# Altium PCB PCB1.PcbDoc
Units mil, origin at the board's own origin, x right, y up, seen from the top; angles counter-clockwise.
Board outline 5725 x 3325 mil, 2 copper layers (Top Layer, Bottom Layer); 43 components, 38 nets, 152 pads, 0 vias.
Unrouted connection lines stored in the file: 70.
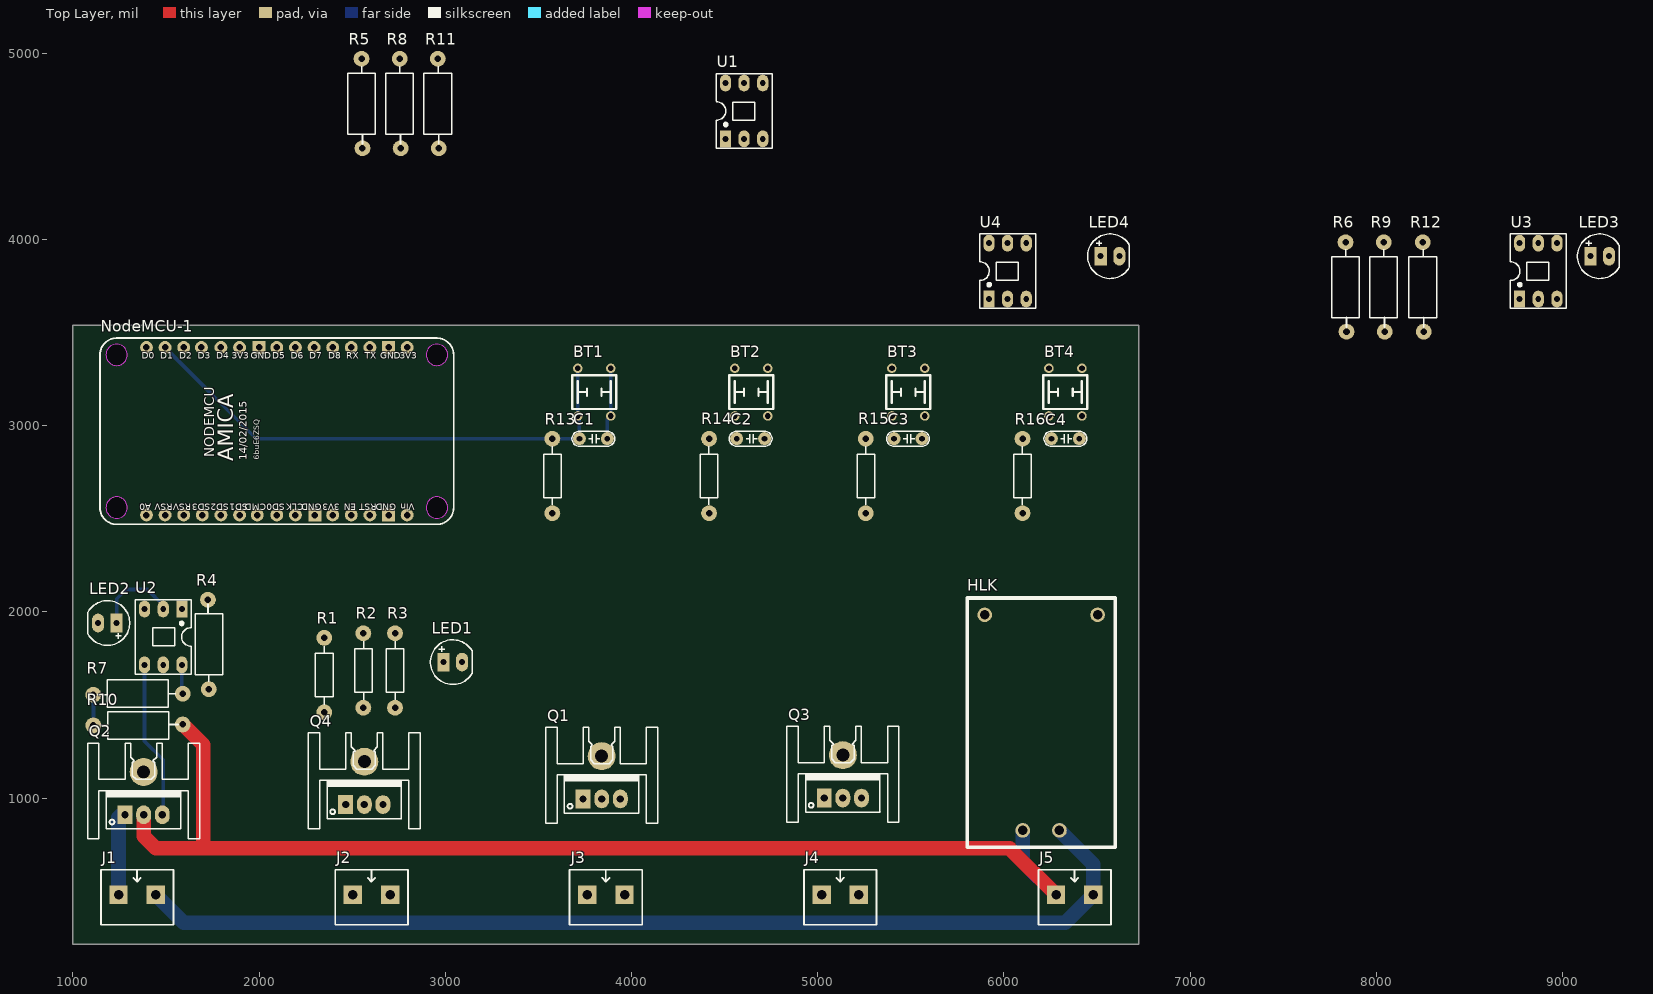
[diagram p0: Top Layer view]
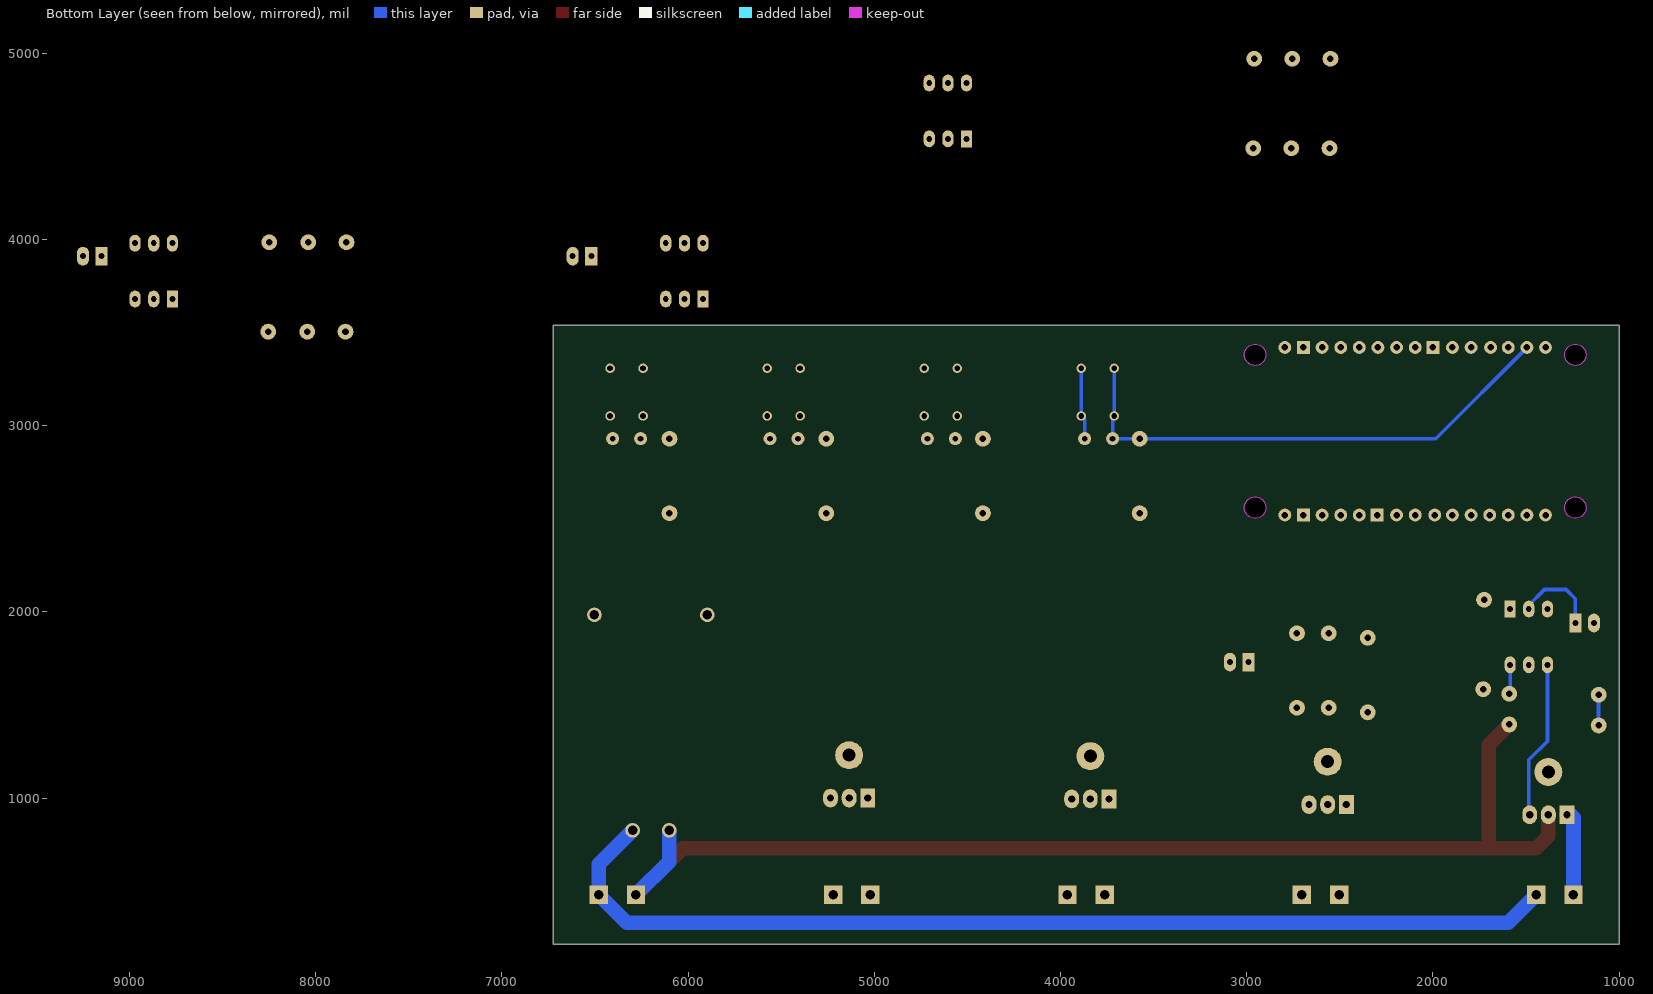
[diagram p1: Bottom Layer view, seen from below]

## Layer stack, top to bottom
Top Solder: solder mask 0.4, Solder Resist, Dk 3.5
Top Layer: signal copper 1.4
Dielectric 1: dielectric 12.6, FR-4, Dk 4.8
Bottom Layer: signal copper 1.4
Bottom Solder: solder mask 0.4, Solder Resist, Dk 3.5

## Board outline
1000,215 6725,215 6725,3540 1000,3540

## Design rules (kind name [scope] priority, off if disabled: settings)
Clearance [All] p1: gap=20 ignorepadtopadclearanceinfootprint=FALSE
PolygonConnect [All] p1: connectstyle=Relief reliefconductorwidth=10 reliefentries=4 polygonreliefangle="90 Angle" airgapwidth=10
RoutingVias [All] p1: holewidth=28 width=50 viastyle="Through Hole" minholewidth=28 minwidth=50 maxholewidth=28 maxwidth=50
SolderMaskExpansion [All] p1: expansion=4
Width POW [InNet('L_OUT1') or InNet('N_IN')  or InNet('L_IN') or InNet('L_OUT2') or InNet('L_OUT3') or InNet('L_OUT4')] p1: maxlimit=98.43 minlimit=59.06 preferedwidth=78.74
Width [All] p2: maxlimit=25 minlimit=15 preferedwidth=20
30 further rules are at their usual default settings.

## Components (designator, comment, footprint, x,y, rotation, side; value= is the part's Value field where it differs from the comment)
BT1 "Button-4pin" Button4pin 3800,3180 r270 top
BT2 "Button-4pin" Button4pin 4643.33,3180 r270 top
BT3 "Button-4pin" Button4pin 5486.67,3180 r270 top
BT4 "Button-4pin" Button4pin 6330,3180 r270 top
C1 "100nF" CN1.5 3800,2930 r180 top value=33pF
C2 "100nF" CN1.5 4645,2930 r180 top value=33pF
C3 "100nF" CN1.5 5490,2930 r180 top value=33pF
C4 "100nF" CN1.5 6335,2930 r180 top value=33pF
HLK "5V5W-HLK-PM01" "HLK_PM01 5V3W" 6200,1405 r90 top
J1 "KF2" KF2-5.08 1345,480 r0 top
J2 "KF2" KF2-5.08 2603.75,480 r0 top
J3 "KF2" KF2-5.08 3862.5,480 r0 top
J4 "KF2" KF2-5.08 5121.25,480 r0 top
J5 "KF2" KF2-5.08 6380,480 r0 top
LED1 "LED" LED-5-RED 2990,1730 r0 top value="LED 3 ly Single Colour"
LED2 "LED" LED-5-RED 1235,1940 r180 top value="LED 3 ly Single Colour"
LED3 "LED" LED-5-RED 9150,3910 r0 top value="LED 3 ly Single Colour"
LED4 "LED" LED-5-RED 6520,3910 r0 top value="LED 3 ly Single Colour"
NodeMCU-1 "NodeMCU V1.0 ESP-12E" "NodeMCU V1.0 ESP-12E" 1149,2469 r90 top
Q1 "BTA24-600" TO220H1 3840,995 r0 top
Q2 "BTA12-600" TO220H1 1380,910 r0 top
Q3 "BTA12-600" TO220H1 5135,1000 r0 top
Q4 "BTA12-600" TO220H1 2565,965 r0 top
R1 "39R" RES-1/4W 2355,1675 r90 top
R2 "180R" RES-1/4W 2565,1700 r90 top
R3 "1.2K" RES-1/4W 2735,1700 r90 top
R4 "39R" RES-1/2W 1730,1845 r270 top
R5 "39R" RES-1/2W 2550,4710 r90 top
R6 "39R" RES-1/2W 7835,3725 r90 top
R7 "180R" RES-1/2W 1330,1560 r0 top
R8 "180R" RES-1/2W 2755,4710 r90 top
R9 "180R" RES-1/2W 8040,3725 r90 top
R10 "1.2K" RES-1/2W 1370,1390 r180 top
R11 "1.2K" RES-1/2W 2960,4710 r90 top
R12 "1.2K" RES-1/2W 8250,3725 r90 top
R13 "10k" RES-1/4W 3570,2715 r270 top
R14 "10k" RES-1/4W 4411.67,2715 r270 top
R15 "10k" RES-1/4W 5253.33,2715 r270 top
R16 "10k" RES-1/4W 6095,2715 r270 top
U1 "MOC3021M" DIP6 4610,4700 r0 top
U2 "MOC3021M" DIP6 1480,1855 r180 top
U3 "MOC3021M" DIP6 8875,3840 r0 top
U4 "MOC3021M" DIP6 6025,3840 r0 top

## Footprints (in the part's own frame and the unit in brackets; to place one, negate y for a bottom-side part, rotate by r counter-clockwise, add the part's x,y. Pads: shape width x height; smd on the part's side, far side on the other; paste and mask are expansions set on the pad)
Button4pin [mm] "KSM0611"
  round 1.3 hole 0.8 mask+0.05: 1(-3.25,2.25) 2(-3.25,-2.25) 3(3.25,2.25) 4(3.25,-2.25)
  silkscreen extent -2.3,-3 2.3,3, body extent -3.95,-3.1 3.95,3.1, height 5
CN1.5 [mil]
  round 70 hole 31: 1(-70,0) 2(80,0)
  silkscreen extent -110,-40 120,40, body extent -110,-33 120,33, height 235
DIP6 [mil]
  rect 60x90 hole 31.5: 1(-105,-160)
  oval 60x90 hole 31.5: 2(-5,-160) 3(95,-160) 4(95,140) 5(-5,140) 6(-105,140)
  silkscreen extent -155,-210 145,190, body extent -163,-167 155,147, height 170
"HLK_PM01 5V3W" [mm] "THOUGH, AC-DC"
  round 2 hole 1.3: 1(-14.7,2.5) 2(-14.7,-2.5) 3(14.7,7.7) 4(14.7,-7.7)
  silkscreen extent -17,-10.1 17,10.1, body extent -17.4,-10.3 16.6,9.9, height 15.6
KF2-5.08 [mm]
  rect 2.5x2.5 hole 1.3: 1(-2.54,0) 2(2.54,0)
  silkscreen extent -4.95,-4.08 4.95,3.43, body extent -5,-4.07 5,3.43, height 10
LED-5-RED [mil] "LED 2 PIN, 5 ly , Only colour,pin to pin 100mil"
  rect 65x100 hole 32: 1(0,0)
  oval 65x100 hole 32: 2(100,0)
  silkscreen extent -70,-120 154,120, body extent -65,-119 149,118, height 339
"NodeMCU V1.0 ESP-12E" [mil]
  round 115 hole 115 unplated paste-300 mask-300: 0(91,-86) 0(91,-1806) 0(911,-86) 0(911,-1806)
  round 69 hole 35: 3V3(51,-1246) 3V3(951,-746) 3V3(951,-1646) A0(51,-246) CLK(51,-1046) CMD(51,-841) D0(951,-246) D1(951,-346) D2(951,-446) D3(951,-541) D4(951,-646) D5(951,-946) D6(951,-1046) D7(951,-1146) D8(951,-1246) EN(51,-1346) RST(51,-1446) RSV(51,-346) RSV(51,-446) RX(951,-1346) SD0(51,-946) SD1(51,-746) SD2(51,-646) SD3(51,-546) TX(951,-1446) VIN(51,-1646)
  rect 69x69 hole 35: GND(51,-1151) GND(51,-1546) GND(951,-851) GND(951,-1546)
  Keep-Out Layer circle w2: c91,-86 r57.5
  Keep-Out Layer circle w2: c911,-86 r57.5
  Keep-Out Layer circle w2: c91,-1806 r57.5
  Keep-Out Layer circle w2: c911,-1806 r57.5
  silkscreen extent 1,-1896 1001,4
RES-1/2W [mil]
  round 85 hole 35: 1(-220,-5) 2(260,0)
  silkscreen extent -195,-74 221,75, body extent -230,-60 270,56, height 121
RES-1/4W [mil]
  round 85 hole 35: 1(-215,5) 2(185,5)
  silkscreen extent -173,-42 141,52, body extent -227,-42 197,52, height 95
TO220H1 [mil] "TO-220 - 1-2-3"
  round 150 hole 70: 0(0,230)
  rect 80x100 hole 39: 1(-100,0)
  oval 80x100 hole 39: 2(0,0) 3(100,0)
  silkscreen extent -300,-130 300,385, body extent -246,-82 250,329, height 1000

## Part data
C1 C2 C3 C4: library part CN
HLK: library part 5V3W-HLK-PM01
J1 J2 J3 J4 J5: Manufacturer="Würth Elektronik eiSos GmbH", partNo=691103110002, ComponentLink1 Description=Manufacturer, ComponentLink1URL=http://www.we-online.com, ComponentLink2 Description=Datasheet, ComponentLink2URL=http://katalog.we-online.de/em/datasheet/6911031100xx.pdf, Created by="Karrer Zheng", Created Date="29 October 2013", NoPins=2
LED1 LED2 LED3 LED4: "LED Single colour Green and Red"
NodeMCU-1: "NodeMCU V1.0 ESP8266 (ESP-12E)"
Q1: library part BTA12-600, "Silicon Bidirectional Triode Thyristor", Code_JEDEC=TO-251-AA, ComponentLink1Description="Manufacturer Link", ComponentLink1URL=http://www.motorola.com/, DatasheetDocument=1999, LatestRevisionDate=17-Jul-2002, LatestRevisionNote="Re-released for DXP Platform.", Note="Pin 2 is electrically connected to Pin 4 (TAB)", PackageReference=369-03, Published=29-Sep-2000, Publisher="Altium Limited"
Q2 Q3 Q4: "Silicon Bidirectional Triode Thyristor", Code_JEDEC=TO-251-AA, ComponentLink1Description="Manufacturer Link", ComponentLink1URL=http://www.motorola.com/, DatasheetDocument=1999, LatestRevisionDate=17-Jul-2002, LatestRevisionNote="Re-released for DXP Platform.", Note="Pin 2 is electrically connected to Pin 4 (TAB)", PackageReference=369-03, Published=29-Sep-2000, Publisher="Altium Limited"
R1 R2 R3 R4 R5 R6 R7 R8 R9 R10 R11 R12 R13 R14 R15 R16: library part Res, "Res", Manufacturer="Generic Components", Class=Passive, Published=08/06/2000, Publisher="Altium Hobart Technology Centre", SubClass=R

## Nets (pads, with @x,y where several pads share a name; then routed paths per layer and width w, separated by ;. In a path a pad name is that pad's centre, name@x,y a point inside that pad or via, vN(x,y) a via of type N, cw(c..) or ccw(c..) an arc to the next point about the centre after c; other vN are vias at no path point)
3V3: BT1.1 BT1.3 BT2.1 BT2.3 BT3.1 BT3.3 BT4.1 BT4.3 C1.1 C2.1 C3.1 C4.1 NodeMCU-1.3V3 | length 385.6
  Bottom Layer w20: C1.1 3870,3033.46 BT1.3 BT1.1
5V: HLK.4 NodeMCU-1.VIN
D0: NodeMCU-1.D0
D1: BT1.2 BT1.4 C1.2 NodeMCU-1.D1 R13.1 | length 2809.5
  Bottom Layer w20: NodeMCU-1.D1 1985,2930 R13.1 C1.2 3720,3043.46 BT1.4 BT1.2
D2: BT2.2 BT2.4 C2.2 NodeMCU-1.D2 R14.1
D3: NodeMCU-1.D3 R1.2
D4: NodeMCU-1.D4 R4.2
D5: BT3.2 BT3.4 C3.2 NodeMCU-1.D5 R15.1
D6: BT4.2 BT4.4 C4.2 NodeMCU-1.D6 R16.1
D7: NodeMCU-1.D7 R5.2
GND: HLK.3 LED1.2 LED2.2 LED3.2 LED4.2 NodeMCU-1.GND R13.2 R14.2 R15.2 R16.2
L_IN: HLK.1 J5.1 Q1.2 Q2.2 Q3.2 Q4.2 R3.1 R10.1 R11.1 R12.1 | length 6276.2
  Top Layer w78.74: Q2.2 1380,795 1445,730 1700,730 ; R10.1 1700,1285 1700,730 ; J5.1 6030,730 1700,730
  Bottom Layer w78.74: HLK.1 6101.57,658.43 J5.1
L_OUT1: J1.1 Q1.1
L_OUT2: J2.1 Q2.1 | length 456.2
  Bottom Layer w78.74: 1245,480 1245,895 1260,910 Q2.1
L_OUT3: J3.1 Q3.1
L_OUT4: J4.1 Q4.1
N_IN: HLK.2 J1.2 J2.2 J3.2 J4.2 J5.2 | length 5580.7
  Bottom Layer w78.74: J1.2 1595,330 6330,330 J5.2 6480,644.68 HLK.2
NetLED1_1: LED1.1 U1.2
NetLED2_1: LED2.1 U2.2 | length 455.9
  Bottom Layer w20: LED2.1 1235,2070 1285,2120 1400,2120 1485,2035 U2.2
NetLED3_1: LED3.1 U3.2
NetLED4_1: LED4.1 U4.2
NetQ1_3: Q1.3 U1.4
NetQ2_3: Q2.3 U2.4 | length 851.4
  Bottom Layer w20: U2.4 1385,1305 1485,1205 1485,910 Q2.3
NetQ3_3: Q3.3 U3.4
NetQ4_3: Q4.3 U4.4
NetR1_1: R1.1 U1.1
NetR2_1: R2.1 R3.2
NetR2_2: R2.2 U1.6
NetR4_1: R4.1 U2.1
NetR5_1: R5.1 U3.1
NetR6_1: R6.1 U4.1
NetR7_1: R7.1 R10.2 | length 165
  Bottom Layer w20: R10.2 R7.1
NetR7_2: R7.2 U2.6 | length 157.1
  Bottom Layer w20: U2.6 1585,1565 R7.2
NetR8_1: R8.1 R11.2
NetR8_2: R8.2 U3.6
NetR9_1: R9.1 R12.2
NetR9_2: R9.2 U4.6
TX: NodeMCU-1.TX R6.2
pads on no net: NodeMCU-1.0 NodeMCU-1.A0 NodeMCU-1.CLK NodeMCU-1.CMD NodeMCU-1.D8 NodeMCU-1.EN NodeMCU-1.RST NodeMCU-1.RSV NodeMCU-1.RX NodeMCU-1.SD0 NodeMCU-1.SD1 NodeMCU-1.SD2 NodeMCU-1.SD3 Q1.0 Q2.0 Q3.0 Q4.0 U1.3 U1.5 U2.3 U2.5 U3.3 U3.5 U4.3 U4.5

## Text inside footprints (layer, text, board x,y; h text height)
NodeMCU-1: Top Overlay "GND" at 2337,2595 h60 r180; Top Overlay "3V3" at 2434,2595 h60 r180; Top Overlay "EN" at 2521,2595 h60 r180; Top Overlay "RST" at 2633,2595 h60 r180; Top Overlay "GND" at 2736,2595 h60 r180; Top Overlay "Vin" at 2836,2595 h60 r180; Top Overlay "D7" at 2270.23,3345 h60; Top Overlay "D8" at 2370.11,3345 h60; Top Overlay "RX" at 2469.06,3345 h60; Top Overlay "TX" at 2568,3345 h60; Top Overlay "GND" at 2651.2,3345 h60; Top Overlay "3V3" at 2755,3345 h60; Top Overlay "D6" at 2169.12,3345 h60; Top Overlay "CMD" at 2038.14,2595 h60 r180; Top Overlay "D0" at 1369,3345 h60; Top Overlay "D1" at 1470.35,3345 h60; Top Overlay "D2" at 1570.58,3345 h60; Top Overlay "D3" at 1670.58,3345 h60; Top Overlay "D4" at 1769,3345 h60; Top Overlay "3V3" at 1854.01,3345 h60; Top Overlay "GND" at 1956,3345 h60; Top Overlay "D5" at 2070,3345 h60; Top Overlay "A0" at 1422,2595 h60 r180; Top Overlay "RSV" at 1536,2595 h60 r180; Top Overlay "RSV" at 1636.43,2595 h60 r180; Top Overlay "SD3" at 1736.86,2595 h60 r180; Top Overlay "SD2" at 1837.29,2595 h60 r180; Top Overlay "SD1" at 1937.71,2595 h60 r180; Top Overlay "SD0" at 2138.57,2595 h60 r180; Top Overlay "CLK" at 2239,2595 h60 r180; Top Overlay "6buE6ZSQ" at 2002,2818 h30 r90; Top Overlay "NODEMCU" at 1778,2829 h90 r90; Top Overlay "AMICA" at 1888,2808 h140 r90; Top Overlay "14/02/2015" at 1947,2814 h69 r90